# Altium PCB PCB1.PcbDoc
Units mil, origin at the board's own origin, x right, y up, seen from the top; angles counter-clockwise.
Board outline 1850.03 x 1050.03 mil, 2 copper layers (Top Layer, Bottom Layer); 11 components, 7 nets, 30 pads, 0 vias.
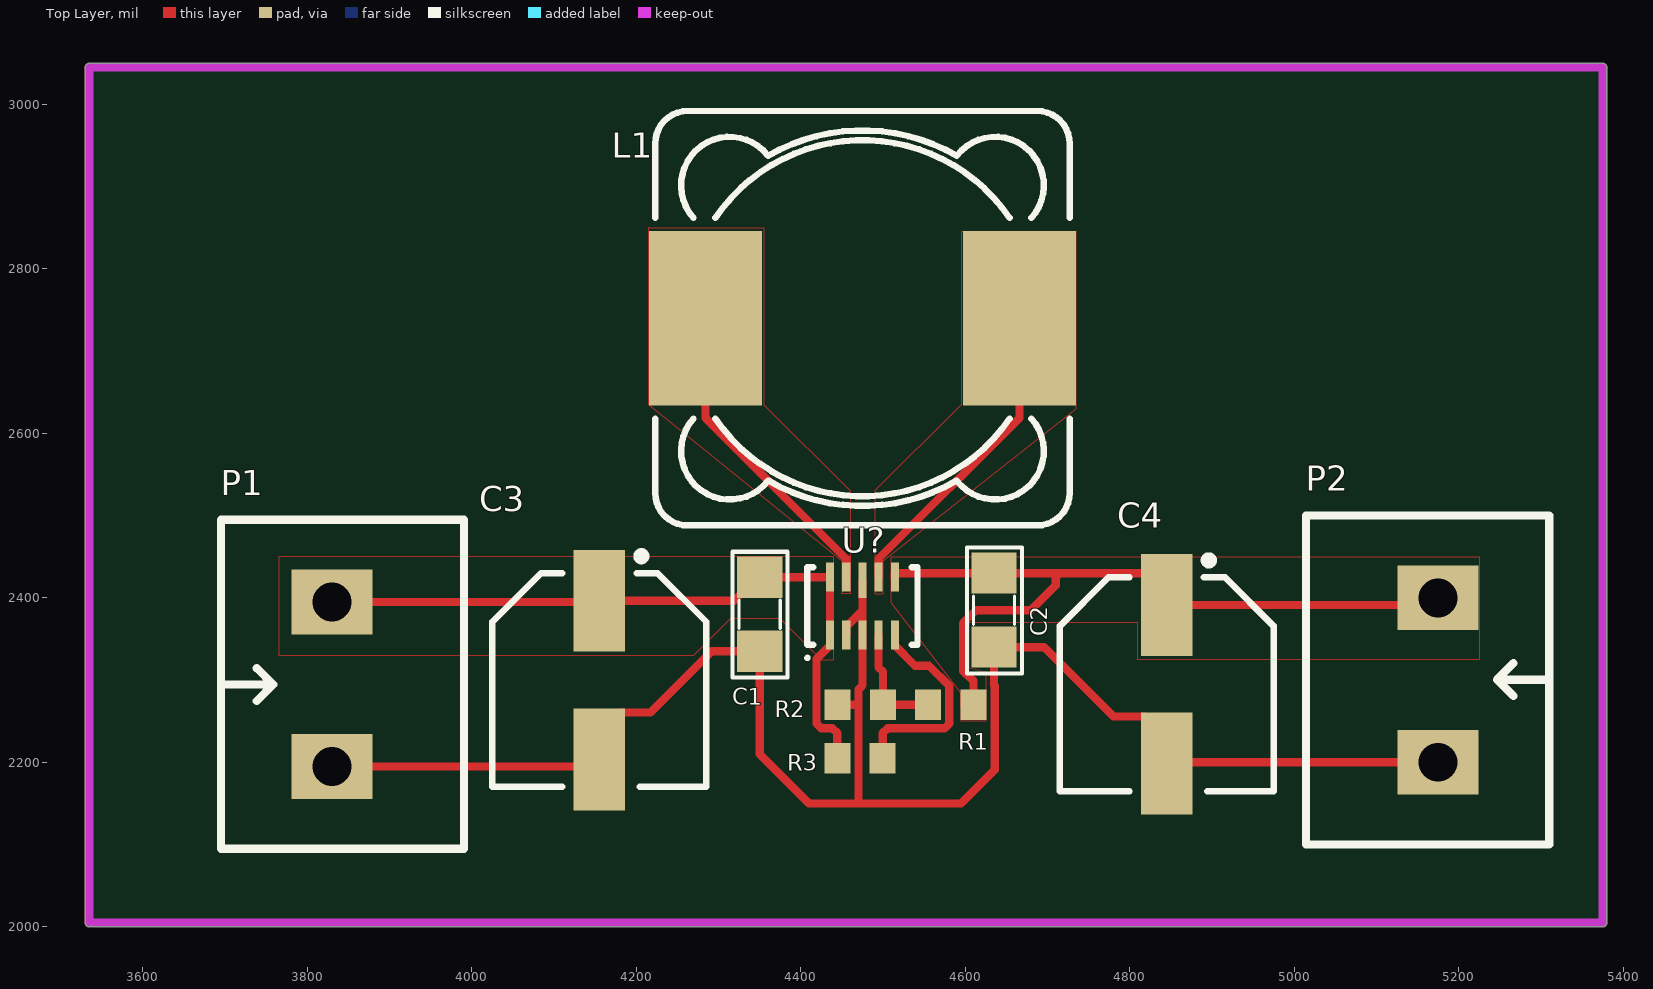
[diagram p0: Top Layer view]
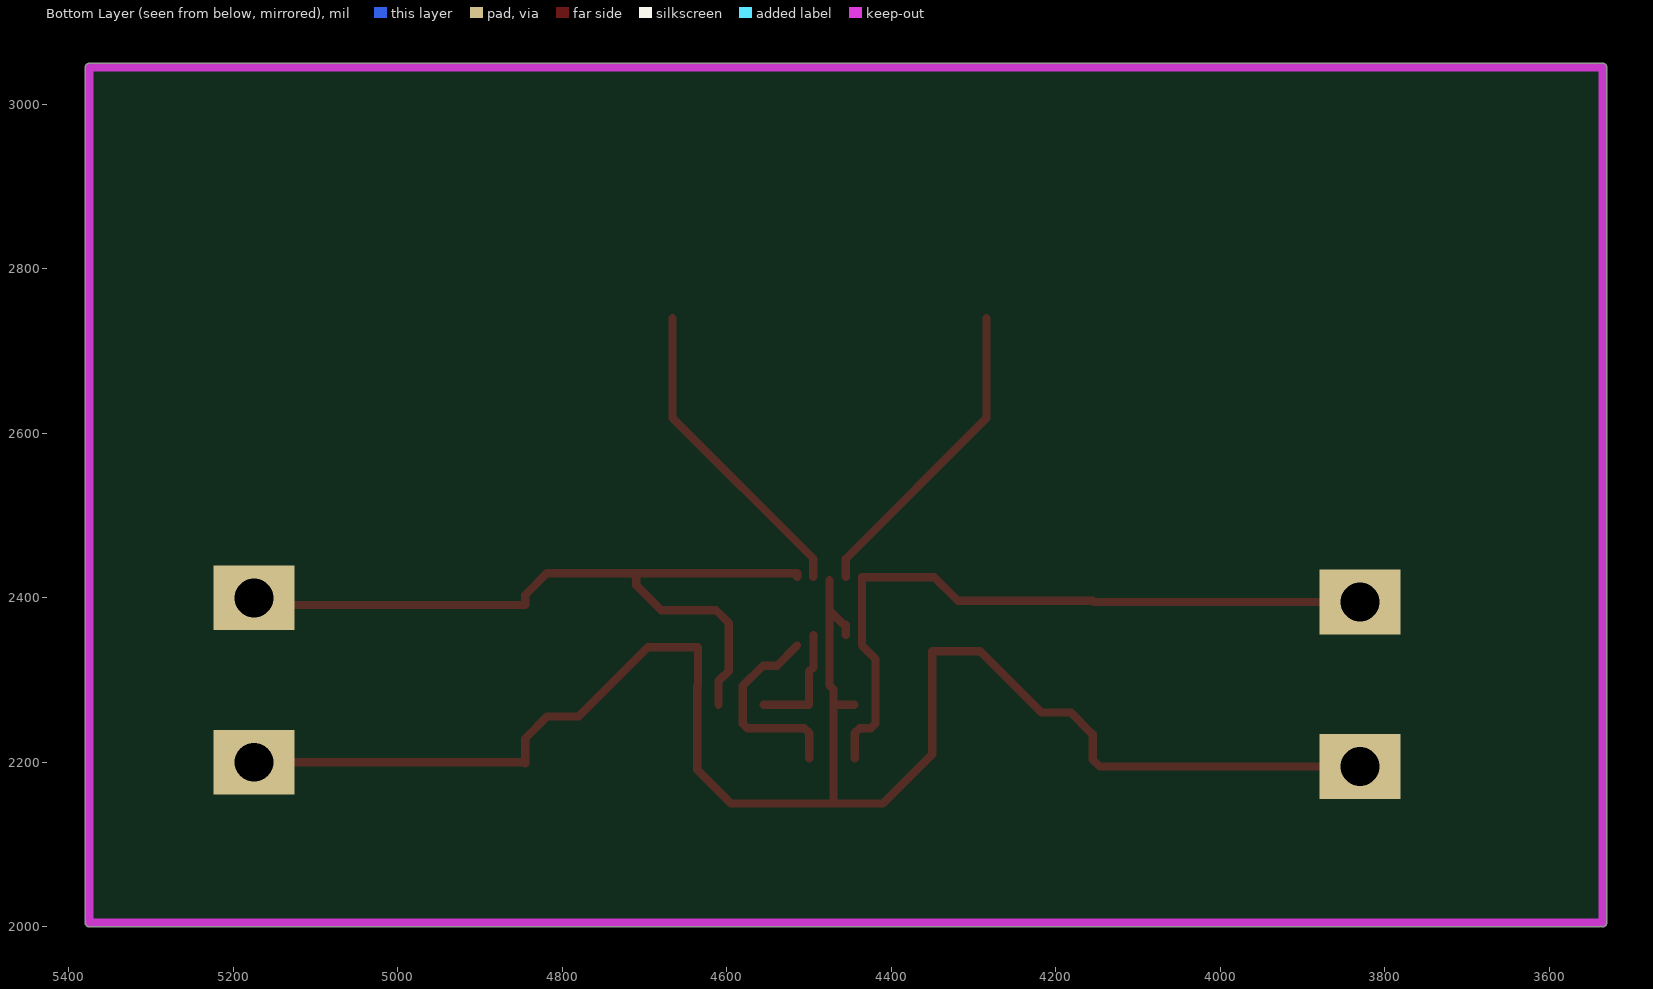
[diagram p1: Bottom Layer view, seen from below]
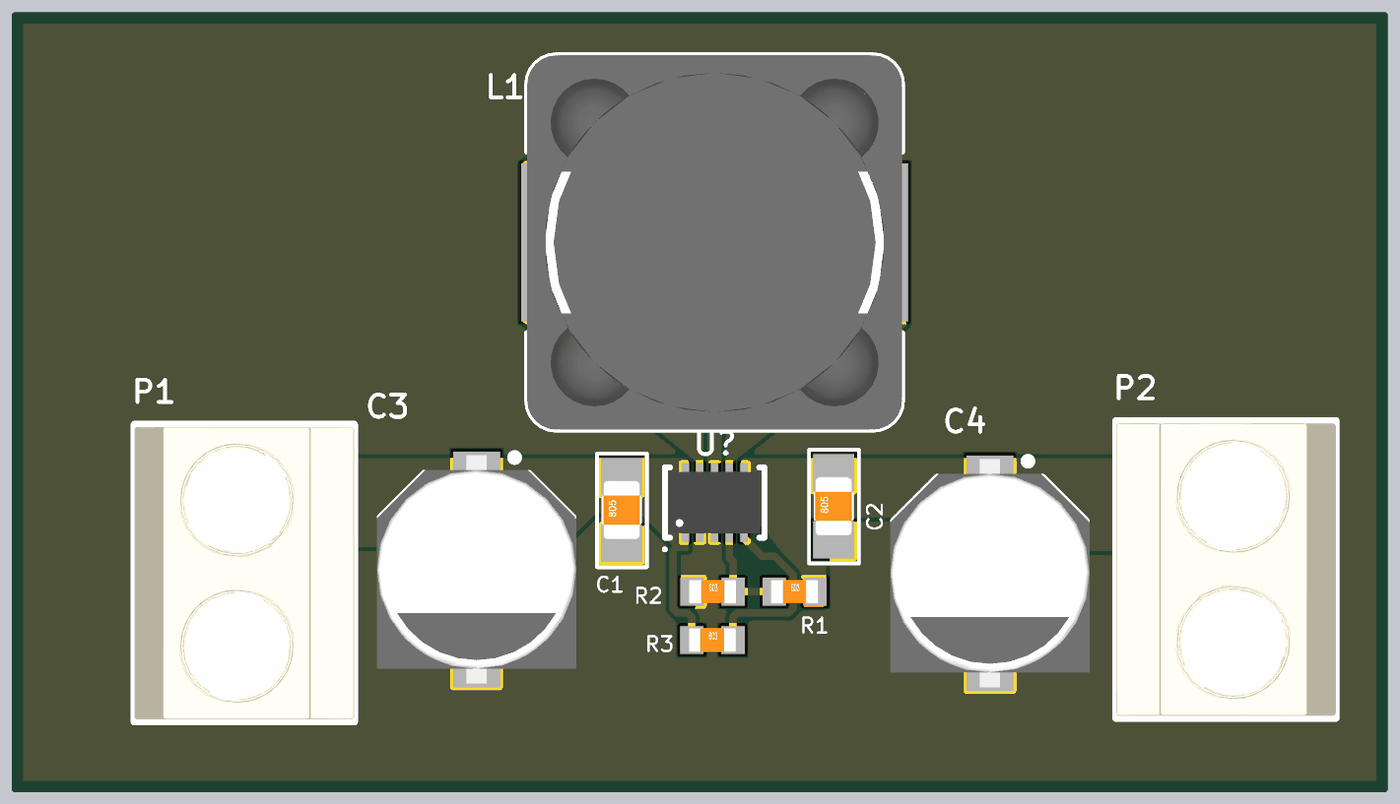
[diagram p2: 3D render of the assembled board from above, using the file's embedded part models]

## Layer stack, top to bottom
Top Solder: solder mask 0.4, Solder Resist, Dk 3.5
Top Layer: signal copper 1.4
Dielectric 1: dielectric 12.6, FR-4, Dk 4.8
Bottom Layer: signal copper 1.4
Bottom Solder: solder mask 0.4, Solder Resist, Dk 3.5

## Board outline
3529.99,2005 3529.99,3045 cw(c3535,3045) 3535,3050.01 5375,3050.01 cw(c5375,3045) 5380.02,3045 5380.02,2005 cw(c5375,2005) 5375,1999.98 3540,1999.98 cw(c3540,2005) 3537.5,2000.65 cw(c3535,2005)

## Design rules (kind name [scope] priority, off if disabled: settings)
Clearance [All] p1: gap=5 ignorepadtopadclearanceinfootprint=FALSE
PolygonConnect PolygonConnect_2 [InNet('NetL1_1') vs InNet('NetL1_1')] p1: connectstyle=Direct reliefconductorwidth=10 reliefentries=4 polygonreliefangle="90 Angle" airgapwidth=10
PolygonConnect PolygonConnect_1 [InNet('NetC1_2') vs InNet('NetC1_2')] p2: connectstyle=Direct reliefconductorwidth=10 reliefentries=4 polygonreliefangle="90 Angle" airgapwidth=10
PolygonConnect [InNet('NetC2_2') vs InNet('NetC2_2')] p3: connectstyle=Direct reliefconductorwidth=10 reliefentries=4 polygonreliefangle="90 Angle" airgapwidth=10
RoutingVias [All] p1: holewidth=28 width=50 viastyle="Through Hole" minholewidth=28 minwidth=50 maxholewidth=28 maxwidth=50
SolderMaskExpansion [All] p1: expansion=4 istentingtop=FALSE
Width [All] p1: maxlimit=45 minlimit=5 preferedwidth=10
30 further rules are at their usual default settings.

## Components (designator, comment, footprint, x,y, rotation, side; value= is the part's Value field where it differs from the comment)
C1 "Cap Non-Pol SMD" CAP-SM-0805 4350,2335 r90 top value=100nF,16V
C2 "Cap Non-Pol SMD" CAP-SM-0805 4635,2340 r90 top value=100nF,16V
C3 "Cap Pol SMD" "CAP ALU SIZE D" 4155,2300 r270 top value=10uF
C4 "Cap Pol SMD" "CAP ALU SIZE D" 4845,2295 r270 top value=10uF
L1 "Inductor" "INDUCTOR 12.5x12.5" 4475,2740 r0 top value=47nH,7A
P1 "Domino 2" "DOMINO 2- 5mm" 3830,2295 r90 top
P2 "Domino 2" "DOMINO 2- 5mm" 5175,2300 r270 top
R1 "RESISTOR SMD" RES-SM-0603 4555.44,2270 r0 top value=511K
R2 "RESISTOR SMD" RES-SM-0603 4445.44,2270 r0 top value=91K
R3 "RESISTOR SMD" RES-SM-0603 4445,2205 r0 top value=100K
U? "TPS63802" SON50P200X100-10N 4475,2390 r90 top

## Footprints (in the part's own frame and the unit in brackets; to place one, negate y for a bottom-side part, rotate by r counter-clockwise, add the part's x,y. Pads: shape width x height; smd on the part's side, far side on the other; paste and mask are expansions set on the pad)
"CAP ALU SIZE D" [mm] "Capacitor, Aluminium Electrolytric, 6.6mm L X 6.6mm W X 5.4mm H, IPC Medium Density"
  rect 3.15x1.6 smd: 1(-2.45,0) 2(2.45,0)
  silkscreen extent -3.95,-3.3 3.3,3.3, body extent -3.9,-3.4 3.9,3.4, height 5.7
CAP-SM-0805 [mil]
  rect 50x55 smd: 1(0,0) 2(90,0)
  silkscreen extent -32,-34 121,33, body extent 6,-25 84,25, height 31
"DOMINO 2- 5mm" [mm]
  rect 2x2.5 hole 1.2: 1(-2.54,0) 2(2.54,0)
  silkscreen extent -5.08,-4.08 5.08,3.43, body extent -5,-4.07 5,3.43, height 10
"INDUCTOR 12.5x12.5" [mm] "SMD Inductor  Body Width 12.5mm Body Lenght 12.5mm Height 8mm"
  rect 3.5x5.4 smd: 1(-4.85,0) 2(4.85,0)
  silkscreen extent -6.4,-6.4 6.4,6.4, body extent -6.4,-6.4 6.4,6.4, height 8
RES-SM-0603 [mm]
  rect 0.8x0.95 smd: 1(-0.014,0) 2(1.386,0)
  body extent -0.11,-0.4 1.49,0.4, height 0.3
SON50P200X100-10N [mm] "SON, 10-Leads, Body 3.00x2.00mm, Pitch 0.50mm, IPC Medium Density"
  rect 0.9x0.25 smd: 1(-0.895,1) 2(-0.895,0.5) 3(-0.895,0) 4(-0.895,-0.5) 5(-0.895,-1) 6(0.895,-1) 7(0.895,-0.5) 9(0.895,0.5) 10(0.895,1)
  rect 1.1x0.25 smd: 8(0.795,0)
  silkscreen extent -1.65,-1.7 1.2,1.75, body extent -1.05,-1.55 1.05,1.55, height 1

## Part data
C1 C2: "Capacitor"
C3 C4: "Polarized Capacitor (Radial)"
P1 P2: "Domino, 2-Pin", LatestRevisionDate=17-Jul-2002, LatestRevisionNote="Re-released for DXP Platform.", Publisher="Altium Limited"
R1 R2 R3: "Resistor"

## Nets (pads, with @x,y where several pads share a name; then routed paths per layer and width w, separated by ;. In a path a pad name is that pad's centre, name@x,y a point inside that pad or via, vN(x,y) a via of type N, cw(c..) or ccw(c..) an arc to the next point about the centre after c; other vN are vias at no path point)
GND: C1.1 C2.1 C3.2 C4.2 P1.1 P2.2 R2.1 U?.2 U?.3 U?.8 | length 2147.4
  Top Layer w10: P1.1 4146.46,2195 C3.2 4155,2234.06 4181.5,2260.55 4217.27,2260.55 4291.72,2335 C1.1 4350,2210 4410,2150 4470.19,2150 ; R2.1 4470.19,2270 ; U?.2 4455.31,2367.4 4455.39,2367.48 4457.83,2367.48 4475,2384.65 ; U?.8 4475,2384.65 ; C4.2 4845,2200 4845,2229.06 4818.5,2255.55 4780.23,2255.55 4695.78,2340 C2.1 4635,2293.59 4635.75,2292.84 4635.75,2190.75 4595,2150 4470.19,2150 ; C4.2@4850,2200 P2.2 ; 4470.19,2150 4470.19,2270 ; 4470.19,2270 4470.19,2288.78 4475,2293.59 U?.3 4475,2384.65
NetC1_2: C1.2 C3.1 P1.2 R3.1 U?.1 U?.10 | length 863.6
  Top Layer w10: P1.2 4153.54,2395 C3.1 4318.96,2396.46 4347.5,2425 C1.2 4435.55,2425 U?.10@4435.63,2425.08 ; U?.10 U?.10@4435.63,2425.08 ; R3.1 4444.44,2235.44 4438.58,2241.3 4424.99,2241.3 4419.13,2247.16 4419.13,2325.63 4435.63,2342.13 U?.1 U?.10@4435.63,2425.08
NetC2_2: C2.2 C4.1 P2.1 R1.2 U?.6 | length 945.3
  Top Layer w10: U?.6 4514.37,2429.92 4514.45,2430 C2.2 4710,2430 4715,2430 ; R1.2 4610,2299.14 4604.14,2305 4603.36,2305 4597.5,2310.86 4597.5,2369.14 4613.36,2385 4680,2385 4710,2415 4710,2425 4715,2430 ; P2.1 5166.46,2391.46 C4.1 4845,2403.5 4818.5,2430 4715,2430
NetL1_1: L1.1 U?.9 | length 385.7
  Top Layer w10: L1.1 4284.06,2618.7 4455.24,2447.52 4455.24,2425.31 U?.9
NetL1_2: L1.2 U?.7 | length 385.7
  Top Layer w10: U?.7 4494.76,2425.31 4494.76,2447.52 4665.94,2618.7 L1.2
NetR1_1: R1.1 R2.2 U?.4 | length 141.8
  Top Layer w10: U?.4 4494.69,2315.57 4500,2310.26 R2.2 R1.1
NetR3_2: R3.2 U?.5 | length 248.6
  Top Layer w10: R3.2 4499.56,2235.44 4505.42,2241.3 4574.77,2241.3 4580.63,2247.16 4580.63,2292.84 4556.03,2317.45 4539.05,2317.45 U?.5@4514.45,2342.05

## Polygon pours and split planes (outlines as drawn)
NetL1_2 on Top Layer "NONET_L01_P002" (solid, shelved, pour order 2): 4735,2845 4595,2845 4595,2635 4490,2530 4490,2405 4500,2405 4500,2445 4735,2630
NetL1_1 on Top Layer "NONET_L01_P000" (solid, shelved, pour order 0): 4215,2850.43 4215.43,2850 4355,2850 4355,2635 4460,2530 4460,2405 4450,2405 4450.46,2405.46 4450.46,2444.62 4215,2635
GND on Top Layer "NONET_L01_P004" (solid, remove dead copper, shelved, pour order 4): 3529.99,2005 3529.99,3045 cw(c3535,3045) 3535,3050.01 5375,3050.01 cw(c5375,3045) 5380.02,3045 5380.02,2005 cw(c5375,2005) 5375,1999.98 3540,1999.98 cw(c3540,2005) 3537.5,2000.65 cw(c3535,2005)
NetC2_2 on Top Layer "NONET_L01_P003" (solid, shelved, pour order 3): 4604.03,2315 4625,2310 4625,2250 4595,2250 4594.57,2284.67 4510,2394.12 4510,2449.83 5224.83,2449.83 5225,2325 4810,2325 4810,2369.98 4604.03,2369.98
NetC1_2 on Top Layer "NONET_L01_P001" (solid, shelved, pour order 1): 4380,2450 3765,2450 3765,2395 3765,2350 3765,2330 3900,2330 4270,2330 4315,2375 4375,2375 4380,2370 4425,2325 4440,2325 4440,2450

## Keep-outs
Keep-Out Layer:
  lines w10: 3535,2005 3535,3045 3540,3045 5375,3045 5375,2785 5375,2265 5375,2005 3540,2005